# Altium PCB djb_v2_jig_a.PcbDoc
Units mm, origin at the board's own origin, x right, y up, seen from the top; angles counter-clockwise.
Board outline 44 x 28 mm, 2 copper layers (Top Layer, Bottom Layer); 18 components, 6 nets, 31 pads, 4 vias.
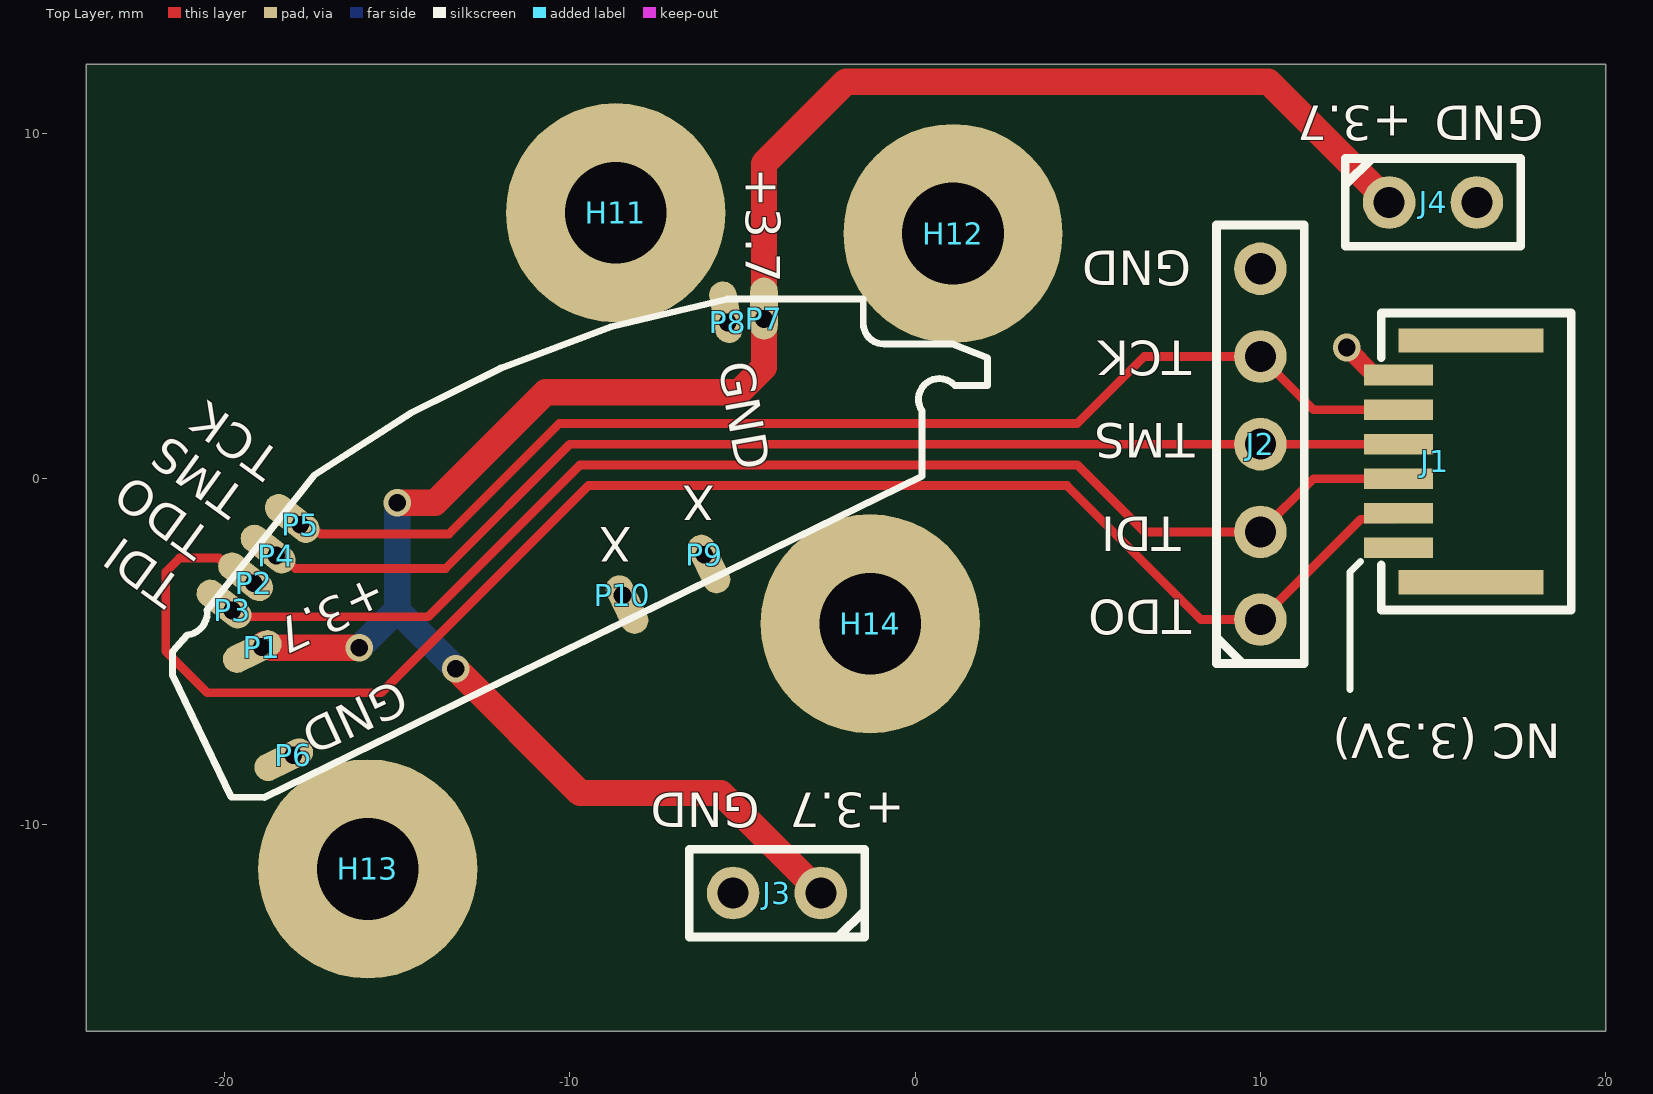
[diagram p0: Top Layer view]
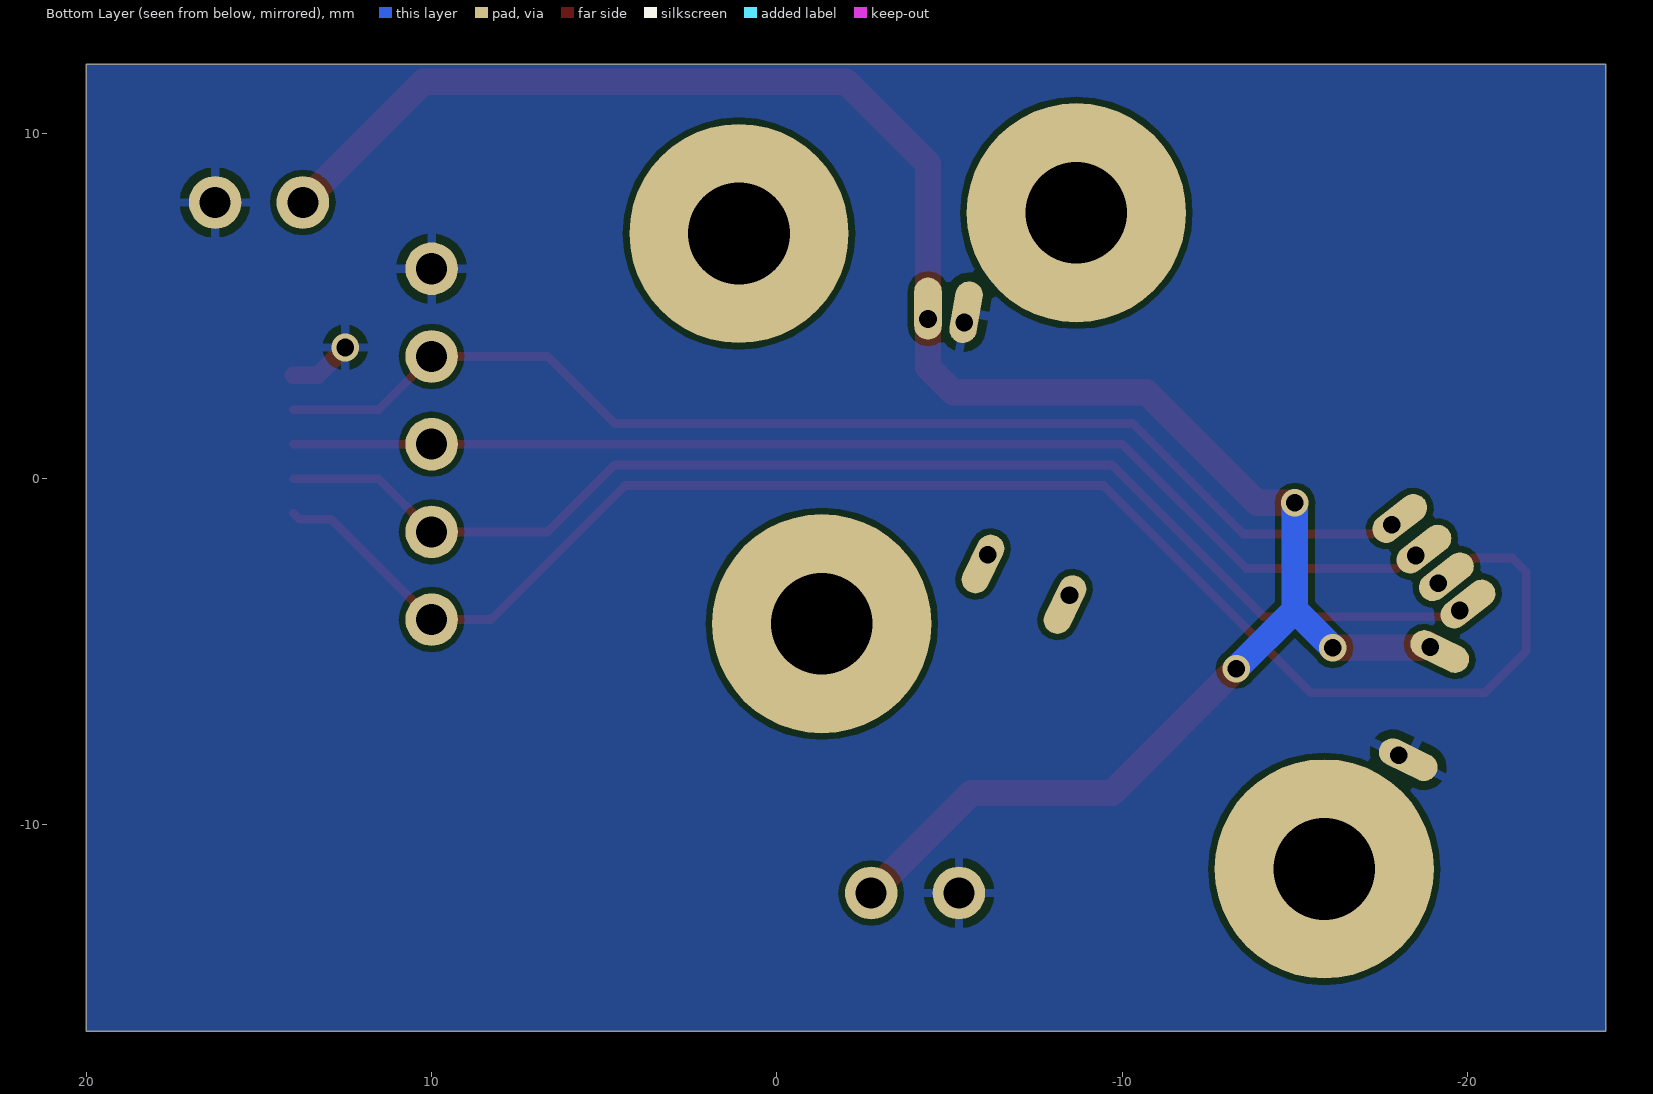
[diagram p1: Bottom Layer view, seen from below]

## Layer stack, top to bottom
Top Solder: solder mask 0.0102, Solder Resist, Dk 3.5
Top Layer: signal copper 0.0356
Dielectric 1: dielectric 0.32, FR-4, Dk 4.8
Bottom Layer: signal copper 0.0356
Bottom Solder: solder mask 0.0102, Solder Resist, Dk 3.5

## Board outline
-24,-16 20,-16 20,12 -24,12

## Design rules (kind name [scope] priority, off if disabled: settings)
Clearance [All] p1: gap=0.178 ignorepadtopadclearanceinfootprint=FALSE
ComponentClearance [All] p1: gap=0.025 collisioncheckmode=3 verticalgap=0.025 showdistances=TRUE
HoleSize [All] p1: absolutevalues=TRUE maxlimit=5.08 minlimit=0.254 maxpercent=80.000 minpercent=20.000
MinimumSolderMaskSliver [All] p1: minsoldermaskwidth=0.127
PolygonConnect [All] p1: connectstyle=Relief reliefconductorwidth=0.254 reliefentries=4 polygonreliefangle="90 Angle" airgapwidth=0.254
RoutingVias [All] p1: holewidth=0.51 width=0.8 viastyle="Through Hole" minholewidth=0.51 minwidth=0.8 maxholewidth=0.51 maxwidth=0.8
SilkToSilkClearance [All] p1: silktosilkclearance=0
SilkToSolderMaskClearance [IsPad] p1: minsilkscreentomaskgap=0 clearancetoexposedcopper=TRUE
SolderMaskExpansion [All] p1: expansion=0.102
Width [All] p1: maxlimit=1.27 minlimit=0.254 preferedwidth=0.254 minimp=50.000000 maximp=50.000000 favimp=50.000000
25 further rules are at their usual default settings.

## Components (designator, comment, footprint, x,y, rotation, side; value= is the part's Value field where it differs from the comment)
H11 "4-40 / 0.25\" spacer" SCREW_4-40_1/4-SPACER -8.671,7.7 r0 top
H12 "4-40 / 0.25\" spacer" SCREW_4-40_1/4-SPACER 1.1,7.1 r0 top
H13 "4-40 / 0.25\" spacer" SCREW_4-40_1/4-SPACER -15.85,-11.3 r0 top
H14 "4-40 / 0.25\" spacer" SCREW_4-40_1/4-SPACER -1.3,-4.2 r0 top
J1 "FFC" AMPHENOL_HFW6R-1STE1LF 16,0.5 r90 top
J2 "HDR_5" HDR_5 10,1 r90 top
J3 "HDR_2" HDR_2 -4,-12 r180 top
J4 "HDR_2" HDR_2 15,8 r0 top
P1 "SMITHS_S-00-U-1.3-G_TH" SMITHS_S-00-U-1.3-G_TH -18.925,-4.875 r116 top
P2 "SMITHS_S-00-U-1.3-G_TH" SMITHS_S-00-U-1.3-G_TH -19.15,-3.025 r52 top
P3 "SMITHS_S-00-U-1.3-G_TH" SMITHS_S-00-U-1.3-G_TH -19.775,-3.816 r52 top
P4 "SMITHS_S-00-U-1.3-G_TH" SMITHS_S-00-U-1.3-G_TH -18.5,-2.225 r52 top
P5 "SMITHS_S-00-U-1.3-G_TH" SMITHS_S-00-U-1.3-G_TH -17.8,-1.336 r52 top
P6 "SMITHS_S-00-U-1.3-G_TH" SMITHS_S-00-U-1.3-G_TH -18.013,-8.007 r116 top
P7 "SMITHS_S-00-U-1.3-G_TH" SMITHS_S-00-U-1.3-G_TH -4.375,4.625 r0 top
P8 "SMITHS_S-00-U-1.3-G_TH" SMITHS_S-00-U-1.3-G_TH -5.425,4.525 r10 top
P9 "SMITHS_S-00-U-1.3-G_TH" SMITHS_S-00-U-1.3-G_TH -6.1,-2.2 r206 top
P10 "SMITHS_S-00-U-1.3-G_TH" SMITHS_S-00-U-1.3-G_TH -8.474,-3.375 r206 top

## Footprints (in the part's own frame and the unit in brackets; to place one, negate y for a bottom-side part, rotate by r counter-clockwise, add the part's x,y. Pads: shape width x height; smd on the part's side, far side on the other; paste and mask are expansions set on the pad)
AMPHENOL_HFW6R-1STE1LF [mm] "Amphenol HFW6R-1STE1LF 6-pin flat flexible cable connector"
  rect 0.7x4.2 smd: 0(-3.5,-0.1) 0(3.5,-0.1)
  rect 0.6x2 smd: 1(-2.5,2) 2(-1.5,2) 3(-0.5,2) 4(0.5,2) 5(1.5,2) 6(2.5,2)
  silkscreen extent -4.3,-3 4.3,2.5, body extent -4.3,-3 4.3,2.5, height 1.9
HDR_2 [mil] "2-pin 0.1\" header"
  round 60 hole 35.43: 1(-50,0) 2(50,0)
  silkscreen extent -100,-50 100,50, body extent -100,-50 100,50, height 400
HDR_5 [mil] "5-pin 0.1\" header"
  round 60 hole 35.43: 1(-200,0) 2(-100,0) 3(0,0) 4(100,0) 5(200,0)
  silkscreen extent -250,-50 250,50, body extent -250,-50 250,50, height 400
SCREW_4-40_1/4-SPACER [mil] "Hole for 4-40 screw with 1/4\" spacer"
  round 250 hole 116 paste-39370.1 mask-39370.1: 0(0,0)
  body extent -125,-125 125,125, height 600
SMITHS_S-00-U-1.3-G_TH [mm] "Smiths Interconnect / IDI S-00-U-1.3-G Pogo Pin, Through-Hole Mount"
  oval 0.8x1.8 hole 0.51 copper offset 0,0.3: 1(0,0)
  body extent -0.34,-0.34 0.34,0.34, height 13.33

## Part data
H11 H12 H13 H14: library part SCREW_4-40_1/4-SPACER
J1: library part AMPHENOL_HFW6R-1STE1LF, "Amphenol HFW6R-1STE1LF 6-pin flat flexible cable connector"
J2: "5-pin 0.1\" header"
J3 J4: "2-pin 0.1\" header"
P1 P2 P3 P4 P5 P6 P7 P8 P9 P10: "Smiths Interconnect / IDI S-00-U-1.3-G Pogo Pin 0.99mm Centers 16.7mm Long 2.8mm Travel, Through Hole Mount"

## Via types
v1: diameter 0.8, hole 0.51, Top Layer to Bottom Layer, tented both sides, 4 vias

## Nets (pads, with @x,y where several pads share a name; then routed paths per layer and width w, separated by ;. In a path a pad name is that pad's centre, name@x,y a point inside that pad or via, vN(x,y) a via of type N, cw(c..) or ccw(c..) an arc to the next point about the centre after c; other vN are vias at no path point)
+3V7: J3.1 J4.1 P1.1 P7.1 | length 61.9
  Top Layer w0.762: P1.1 -18.845,-4.795 -18.728,-4.795 -18.622,-4.9 v1(-16.1,-4.9) ; v1(-15,-0.7) -13.9,-0.7 -10.7,2.5 -5.1,2.5 -4.375,3.225 P7.1 -4.375,9.125 -2,11.5 10.23,11.5 J4.1 ; v1(-13.3,-5.5) -9.7,-9.1 -5.63,-9.1 J3.1
  Bottom Layer w0.762: v1(-16.1,-4.9) -15,-3.8 ; v1(-15,-0.7) -15,-3.8 ; v1(-13.3,-5.5) -15,-3.8
GND: J1.6 J2.5 J3.2 J4.2 P6.1 P8.1 | length 1.8
  Top Layer w0.508: v1(12.5,3.8) 13.3,3 J1.6
TCK: J1.5 J2.4 P5.1 | length 34.7
  Top Layer w0.254: P5.1 -17.572,-1.564 -17.257,-1.564 -17.221,-1.6 -13.5,-1.6 -10.3,1.6 4.7,1.6 6.64,3.54 J2.4 11.54,2 J1.5
TDI: J1.3 J2.2 P3.1 | length 37.1
  Top Layer w0.254: P3.1 -19.591,-4 -14.1,-4 -9.7,0.4 4.7,0.4 6.64,-1.54 J2.2 11.54,0 J1.3
TDO: J1.2 J2.1 P2.1 | length 46.9
  Top Layer w0.254: P2.1 -19.436,-3.025 -20.161,-2.3 -21.3,-2.3 -21.7,-2.7 -21.7,-5 -20.5,-6.2 -15.464,-6.2 -9.464,-0.2 4.4,-0.2 8.28,-4.08 J2.1 12.907,-1.173 13.827,-1.173 J1.2
TMS: J1.4 J2.3 P4.1 | length 34.1
  Top Layer w0.254: P4.1 -18.318,-2.225 -17.943,-2.6 -13.6,-2.6 -10,1 J2.3 J1.4
pads on no net: H11.0 H12.0 H13.0 H14.0 J1.0 J1.1 P9.1 P10.1

## Polygon pours and split planes (outlines as drawn)
GND on Bottom Layer "Bottom Layer-GND" (solid, pour order 2): -24,12 20,12 20,-16 -24,-16
no net on Bottom Layer "Bottom Layer-No Net" (solid, pour order 0): -23,13

## Silkscreen, mask and mechanical layers (free items; w line width, h text height)
Top Overlay:
  lines w0.2: 0.197,1.973 cw(c0.7,2.3) 1.148,2.699 ; 0.2,1.975 0.2,0.07 -18.836,-9.227 -19.8,-9.225 -21.5,-5.7 -21.5,-5 -21.075,-4.525 ccw(c-21.153,-3.875) -20.503,-3.797 -17.4,0.1 -14.6,1.9 -12,3.2 -8.8,4.4 -5.44,5.2 -1.5,5.2 -1.5,4.5 ; 1.148,2.7 2.1,2.7 2.1,3.5 1.1,3.9 -0.9,3.9 cw(c-0.9,4.5) -1.5,4.5 ; 12.6,-6.1 12.6,-2.7 12.9,-2.4 ; -1.5,4.5 -1.5,4.5
  text "+3.7" at 14.4,10.8 h1 r180
  text "GND" at 18.2,10.8 h1 r180
  text "+3.7" at -4.9,9 h1 r270
  text "GND" at 8,6.6 h1 r180
  text "TCK" at 8,4 h1 r180
  text "GND" at -5.7,3.3 h1 r280
  text "TMS" at 8.1,1.6 h1 r180
  text "TCK" at -18.3,0.7 h1 r144
  text "X" at -5.8,-0.2 h1 r180
  text "TMS" at -19.3,-0.4 h1 r144
  text "TDI" at 7.7,-1.1 h1 r180
  text "X" at -8.2,-1.4 h1 r180
  text "TDO" at -20.3,-1.6 h1 r144
  text "+3.7" at -15.6,-2.8 h1 r205
  text "TDI" at -21.153,-3 h1 r144
  text "TDO" at 8,-3.5 h1 r180
  text "GND" at -15,-5.8 h1 r205
  text "NC (3.3V)" at 18.7,-7.1 h1 r180
  text "GND" at -4.5,-9.1 h1 r180
  text "+3.7" at -0.3,-9.1 h1 r180
Top Solder:
  region: -5.27,5.6 -4.7,5.6 -4.7,4.2 -5.1,4.2
  region: -18.576,-0.771 -20.4,-3 -19.3,-3.9 -17.526,-1.535
Bottom Solder:
  region: -5.27,5.6 -4.7,5.6 -4.7,4.2 -5.1,4.2
  region: -18.576,-0.771 -20.4,-3 -19.3,-3.9 -17.526,-1.535
Mechanical 3:
  the board outline again, w0.2